# EAGLE board coilcube (EAGLE 6.3)
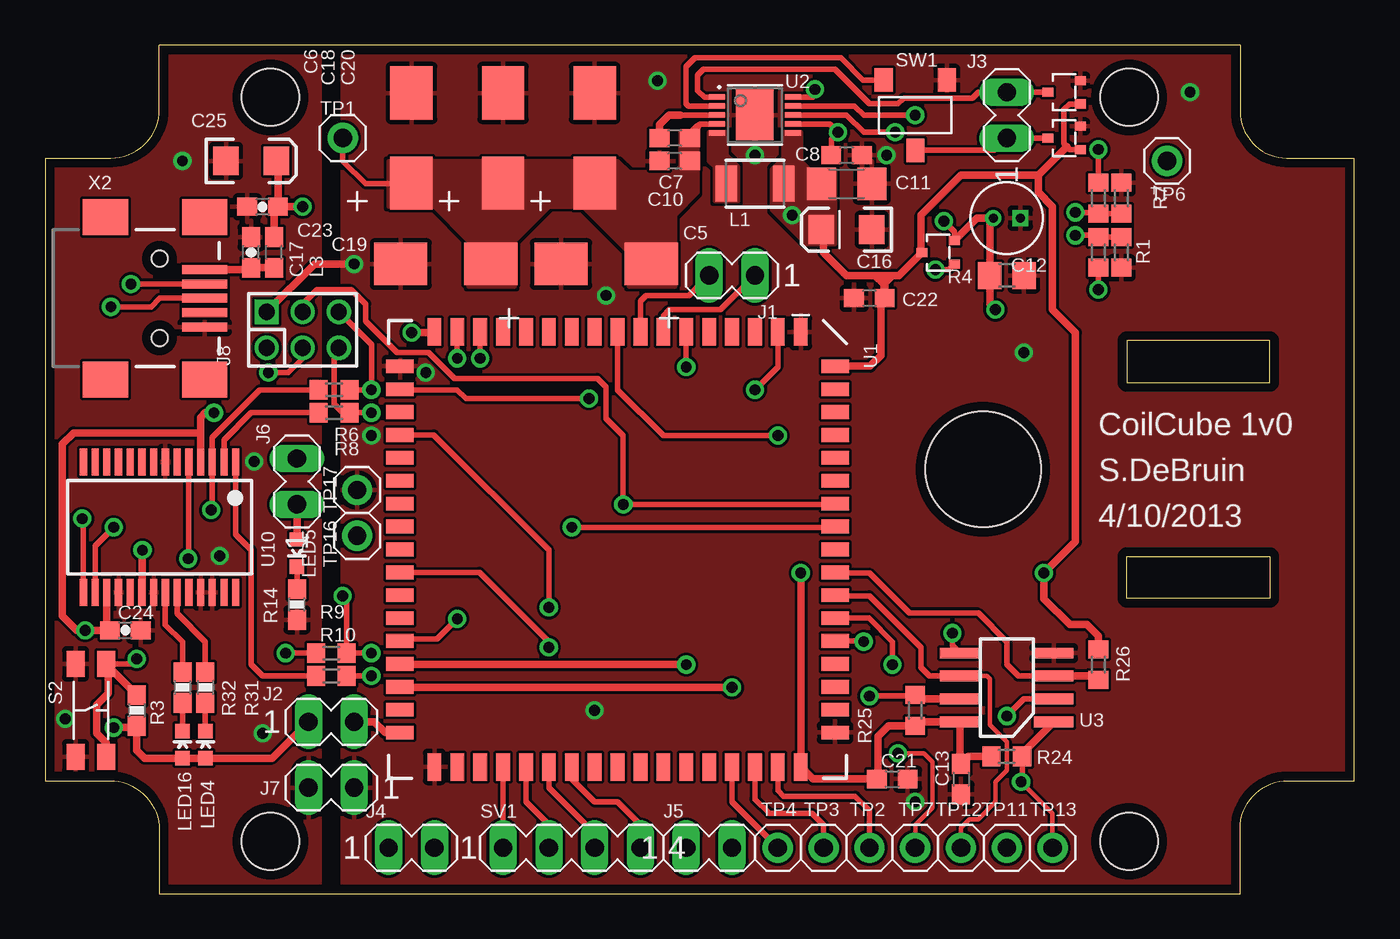
[diagram p0: board, top side]
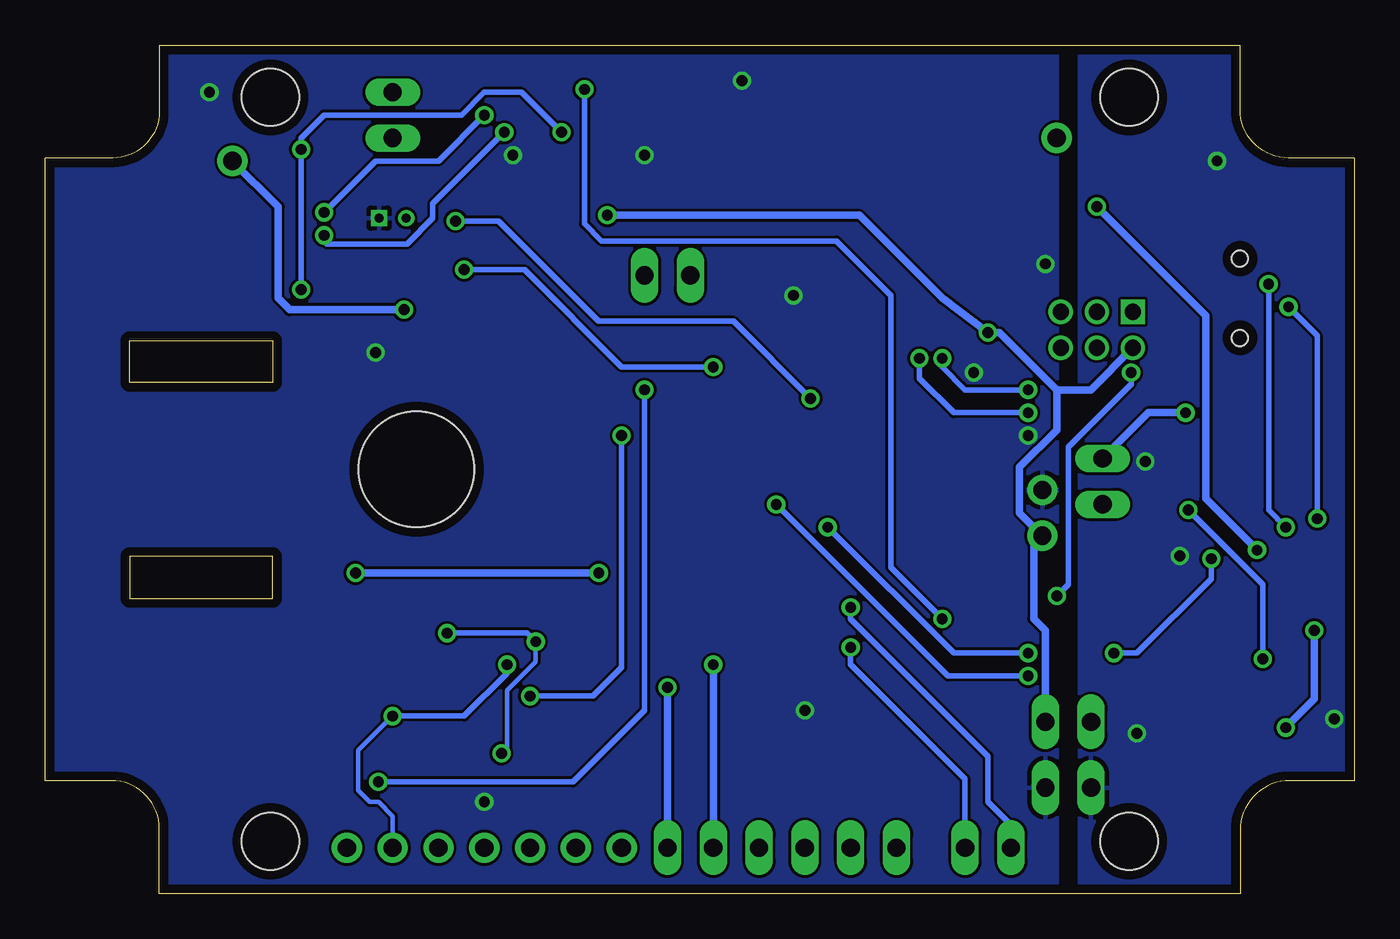
[diagram p1: board, bottom side, seen from below]

Size 72.62 x 47.07 mm. Coordinates in mm from the lower left corner, seen from the top.
Outline: 6.34,0 66.28,0 66.28,3.6 arc-90 68.94,6.26 72.62,6.26 72.62,40.8 68.87,40.8 arc-90 66.28,43.39 66.28,47.07 6.34,47.07 6.34,43.49 arc-90 3.65,40.8 0,40.8 0,6.26 3.58,6.26 arc-90 6.34,3.51 6.34,0
Outline: 59.99,30.68 59.99,28.35 67.92,28.35 67.92,30.68 59.99,30.68
Outline: 59.99,16.36 59.99,18.69 67.92,18.69 67.92,16.36 59.99,16.36
Copper layers (1*16): Top 0.0178mm / dielectric 59mil / Bottom 0.0178mm
Design rules "SSC-EAGLE-2Lyr_v1.0.0.3": minimum track width 6mil, minimum drill 14mil, track to track 6mil, track to pad 6mil, pad to pad 6mil, via to via 6mil, smd to smd 6mil, copper to edge 20mil, drill to drill 16mil, minimum pad ring 8mil, minimum via ring 8mil, stop-mask expansion 3mil, vias tented up to drill 0mil, thermal gap 10mil
Holes 6.43 mm at 52.02,23.53
Holes 3.17 mm at 12.5,44.17 12.5,2.9 60.12,2.9 60.12,44.17

## Footprints (pad centres in the part's own frame; a part is rotated, then mirrored left to right if it is on the bottom)
2917_CAP_POL = smd 2.95 x 2.35: + -2.5,0; - 2.5,0
C0603 = smd 1.1 x 1: 1 -0.85,0; 2 0.85,0
C1206 = smd 1.6 x 1.8: 1 -1.4,0; 2 1.4,0
CPOL_EEA_1MM5 = drill 0.5: + 0.75,0 | drill 0.5 square: - -0.75,0
EIA3216 = smd 1.4 x 1.6: A 1.4,0; C -1.4,0
0603-CAP = smd 1.1 x 1: 1 -0.85,0; 2 0.85,0
MA02-1 = drill 1.016 long: 1 -1.27,0; 2 1.27,0
HEADER2X3X2MM = drill 0.9: P$1 -1,2; P$3 -1,0; P$4 1,0; P$5 -1,-2; P$6 1,-2 | drill 0.9 square: P$2 1,2
1210 = smd 1.2 x 2: 1 -1.6,0; 2 1.6,0
0603 = smd 1.1 x 1: 1 -0.85,0; 2 0.85,0
LED-0603 = smd 0.8 x 0.8: A 0,-0.75; C 0,0.75
R0603 = smd 1 x 1.1: 1 -0.85,0; 2 0.85,0
0603-RES = smd 1.1 x 1: 1 -0.85,0; 2 0.85,0
R0805 = smd 1.3 x 1.5: 1 -0.95,0; 2 0.95,0
SWITCH-OFF-MOM = smd 1.45 x 1: P$1 2.575,0.85; P$2 2.575,-0.85; P$3 -2.575,0.85; P$4 -2.575,-0.85
MA04-1 = drill 1.016 long: 1 -3.81,0; 2 -1.27,0; 3 1.27,0; 4 3.81,0
SWITCH_SPDP = smd 1 x 1.3: P1 1.75,-1.95; P2 0,1.95; P3 -1.75,-1.95
NCHAN_MOSFET = smd 0.6 x 0.5: D -0.9,0; G 0.9,-0.65; S 0.9,0.65
MA01-1 = drill 1.016 pad 1.676: 1 0,0
EPIC-LCC68 = smd 1.524 x 0.762: P$1 -12.065,10.16; P$2 -12.065,8.89; P$3 -12.065,7.62; P$4 -12.065,6.35; P$5 -12.065,5.08; P$6 -12.065,3.81; P$7 -12.065,2.54; P$8 -12.065,1.27; P$9 -12.065,0; P$10 -12.065,-1.27; P$11 -12.065,-2.54; P$12 -12.065,-3.81; P$13 -12.065,-5.08; P$14 -12.065,-6.35; P$15 -12.065,-7.62; P$16 -12.065,-8.89; P$17 -12.065,-10.16; P$35 12.065,-10.16; P$36 12.065,-8.89; P$37 12.065,-7.62; P$38 12.065,-6.35; P$39 12.065,-5.08; P$40 12.065,-3.81; P$41 12.065,-2.54; P$42 12.065,-1.27; P$43 12.065,0; P$44 12.065,1.27; P$45 12.065,2.54; P$46 12.065,3.81; P$47 12.065,5.08; P$48 12.065,6.35; P$49 12.065,7.62; P$50 12.065,8.89; P$51 12.065,10.16 | smd 0.762 x 1.524: P$18 -10.16,-12.065; P$19 -8.89,-12.065; P$20 -7.62,-12.065; P$21 -6.35,-12.065; P$22 -5.08,-12.065; P$23 -3.81,-12.065; P$24 -2.54,-12.065; P$25 -1.27,-12.065; P$26 0,-12.065; P$27 1.27,-12.065; P$28 2.54,-12.065; P$29 3.81,-12.065; P$30 5.08,-12.065; P$31 6.35,-12.065; P$32 7.62,-12.065; P$33 8.89,-12.065; P$34 10.16,-12.065; P$52 10.16,12.065; P$53 8.89,12.065; P$54 7.62,12.065; P$55 6.35,12.065; P$56 5.08,12.065; P$57 3.81,12.065; P$58 2.54,12.065; P$59 1.27,12.065; P$60 0,12.065; P$61 -1.27,12.065; P$62 -2.54,12.065; P$63 -3.81,12.065; P$64 -5.08,12.065; P$65 -6.35,12.065; P$66 -7.62,12.065; P$67 -8.89,12.065; P$68 -10.16,12.065
MSOP-10-GNDPAD = smd 0.305 x 0.889: 1 -1,-2.11; 2 -0.5,-2.11; 3 0,-2.11; 4 0.5,-2.11; 5 1,-2.11; 6 1,2.11; 7 0.5,2.11; 8 0,2.11; 9 -0.5,2.11; 10 -1,2.11 | smd 2.794 x 2.083: GND 0,0
SOIC_8 = smd 2.2 x 0.6: P1 -2.6,1.905; P2 -2.6,0.635; P3 -2.6,-0.635; P4 -2.6,-1.905; P5 2.6,-1.905; P6 2.6,-0.635; P7 2.6,0.635; P8 2.6,1.905
SSOP28 = smd 0.4 x 1.5: 1 -4.225,-3.625; 2 -3.575,-3.625; 3 -2.925,-3.625; 4 -2.275,-3.625; 5 -1.625,-3.625; 6 -0.975,-3.625; 7 -0.325,-3.625; 8 0.325,-3.625; 9 0.975,-3.625; 10 1.625,-3.625; 11 2.275,-3.625; 12 2.925,-3.625; 13 3.575,-3.625; 14 4.225,-3.625; 15 4.225,3.625; 16 3.575,3.625; 17 2.925,3.625; 18 2.275,3.625; 19 1.625,3.625; 20 0.975,3.625; 21 0.325,3.625; 22 -0.325,3.625; 23 -0.975,3.625; 24 -1.625,3.625; 25 -2.275,3.625; 26 -2.925,3.625; 27 -3.575,3.625; 28 -4.225,3.625
USB-MINIB = smd 2.5 x 0.5: D+ 2.5,0; D- 2.5,0.8; GND 2.5,-1.6; ID 2.5,-0.8; VBUS 2.5,1.6 | smd 2.5 x 2: GND@1 -3,-4.5; GND@2 -3,4.5; GND@3 2.5,4.5; GND@4 2.5,-4.5 | hole 0.9: 0,2.2; 0,-2.2

## Placement (x,y rotation side)
C5  100uF 25V  [2917_CAP_POL]  31.11,34.92 180 top
C6  100uF 25V  [2917_CAP_POL]  20.32,41.91 90 top
C7  1uF  [C0603]  34.92,41.91 180 top
C8  4.7uF  [C0603]  44.45,40.96 0 top
C10  0.1uF  [C0603]  34.92,40.64 180 top
C11  10uF  [C1206]  44.45,39.37 0 top
C12  2.2uF  [CPOL_EEA_1MM5]  53.34,37.47 180 top
C13  0.1uF  [C0603]  50.8,6.35 270 top
C16  47uF  [EIA3216]  44.45,36.83 180 top
C17  [0603-CAP]  11.43,35.56 90 top
C18  100uF 25V  [2917_CAP_POL]  25.4,41.91 90 top
C19  100uF 25V  [2917_CAP_POL]  22.23,34.92 180 top
C20  100uF 25V  [2917_CAP_POL]  30.48,41.91 90 top
C21  0.1uF  [C0603]  46.99,6.35 0 top
C22  0.1uF  [C0603]  45.72,33.02 180 top
C23  [0603-CAP]  12.06,38.1 180 top
C24  [0603-CAP]  4.45,14.61 0 top
C25  [EIA3216]  11.43,40.64 0 top
J1  MA02-1  [MA02-1]  38.1,34.29 180 top
J2  MA02-1  [MA02-1]  15.88,9.53 0 top
J3  MA02-1  [MA02-1]  53.34,43.18 90 top
J4  MA02-1  [MA02-1]  20.32,2.54 0 top
J5  MA02-1  [MA02-1]  36.83,2.54 0 top
J6  MA02-1  [MA02-1]  13.97,22.86 90 top
J7  MA02-1  [MA02-1]  15.88,5.87 180 top
J8  EPIC-PROG-PORT  [HEADER2X3X2MM]  14.29,31.27 90 top
L1  10uH  [1210]  39.37,39.37 0 top
L3  [0603]  12.7,35.56 90 top
LED4  [LED-0603]  8.89,8.26 0 top
LED5  [LED-0603]  13.97,18.89 180 top
LED16  [LED-0603]  7.62,8.26 0 top
R1  0  [R0603]  58.42,35.56 270 top
R2  NP  [R0603]  59.69,35.56 270 top
R3  10k  [0603-RES]  5.08,10.16 270 top
R4  4.7M  [R0805]  53.34,34.29 180 top
R5  NP  [R0603]  58.42,38.58 90 top
R6  0  [R0603]  16.03,27.94 0 top
R7  0  [R0603]  59.69,38.58 90 top
R8  0  [R0603]  16.03,26.67 0 top
R9  0  [R0603]  15.88,13.34 0 top
R10  0  [R0603]  15.88,12.06 0 top
R14  240  [0603-RES]  13.97,16.03 90 top
R24  4.7k  [R0603]  53.34,7.62 180 top
R25  4.7k  [R0603]  48.26,10.16 270 top
R26  4.7k  [R0603]  58.42,12.7 90 top
R31  240  [0603-RES]  8.89,11.43 270 top
R32  240  [0603-RES]  7.62,11.43 270 top
S2  SWITCH-OFF-MOM  [SWITCH-OFF-MOM]  2.54,10.16 90 top
SV1  [MA04-1]  29.21,2.54 0 top
SW1  SWITCH_SPDP  [SWITCH_SPDP]  48.26,43.18 180 top
T1  NCHAN_MOSFET  [NCHAN_MOSFET]  56.52,44.45 0 top
T2  NCHAN_MOSFET  [NCHAN_MOSFET]  49.53,35.56 0 top
T3  NCHAN_MOSFET  [NCHAN_MOSFET]  56.52,41.91 0 top
TP1  ORANGE  [MA01-1]  16.51,41.91 0 top
TP2  WHITE  [MA01-1]  45.72,2.54 0 top
TP3  WHITE  [MA01-1]  43.18,2.54 0 top
TP4  WHITE  [MA01-1]  40.64,2.54 0 top
TP6  BLUE  [MA01-1]  62.23,40.64 0 top
TP7  WHITE  [MA01-1]  48.26,2.54 0 top
TP11  WHITE  [MA01-1]  53.34,2.54 0 top
TP12  WHITE  [MA01-1]  50.8,2.54 0 top
TP13  GREEN  [MA01-1]  55.88,2.54 0 top
TP16  RED  [MA01-1]  17.3,19.84 0 top
TP17  BLACK  [MA01-1]  17.3,22.38 0 top
U1  EPIC-CORE_A  [EPIC-LCC68]  31.75,19.09 270 top
U2  LTC3588_  [MSOP-10-GNDPAD]  39.37,43.18 270 top
U3  FM25LB  [SOIC_8]  53.34,11.43 180 top
U10  FT232RL  [SSOP28]  6.35,20.32 180 top
X2  USBSMD  [USB-MINIB]  6.35,33.02 0 top

## Library data of the parts
C5 C6 C18-C20 = coilcube; DIGIKEY: 399-5175-1-ND
C7 = rcl; DIGIKEY: 445-1321-1-ND
C8 = rcl; DIGIKEY: 445-5178-1-ND
C10 C13 C21 C22 = rcl; DIGIKEY: 445-1316-1-ND
C11 = rcl; DIGIKEY: 399-8152-1-ND
C12 = coilcube; DIGIKEY: P14506-ND
C16 = SparkFun-Passives; DIGIKEY: 399-3700-1-ND
C17 C23 C24 = SparkFun; DIGIKEY: 445-1316-1-ND
C25 = SparkFun; DIGIKEY: 478-1655-1-ND
J1 J2 J4 J6 J7 = con-lstb; DIGIKEY: 609-4434-ND
J3 = con-lstb; DIGIKEY: A98333-ND
J5 = con-lstb; DIGIEKY: 609-4434-ND
J8 = berkeley-epic; DIGIKEY: WM18834-ND
L1 = SparkFun-Passives; DIGIKEY: 587-1625-1-ND
L3 = SparkFun; DIGIKEY: 240-2373-1-ND
LED4 = SparkFun; DIGIKEY: 1080-1400-1-ND
LED5 LED16 = SparkFun; DIGIKEY: 1080-1405-1-ND
R1 R6-R10 = rcl; DIGIKEY: P0.0GCT-ND
R2 R5 = rcl
R3 = SparkFun; DIGIKEY: P10KGCT-ND
R4 = rcl; DIGIKEY: P4.7MACT-ND
R14 R31 R32 = SparkFun; DIGIKEY: P240GCT-ND
R24-R26 = rcl; DIGIKEY: P4.7KGCT-ND
S2 = p498; DIGIKEY: P11084SCT-ND
SV1 = con-lstb; DIGIKEY: 609-3248-ND; OC_FARNELL: unknown; OC_NEWARK: unknown
SW1 = coilcube; DIGIKEY: 563-1022-1-ND
T1 T3 = Power_Metering; DIGIKEY: SI1302DL-T1-GE3CT-ND
T2 = Power_Metering; DIGIKEY: 568-3244-1-ND
TP1 = con-lstb; DIGIKEY: 5003K-ND
TP2-TP4 TP7 TP11 TP12 = con-lstb; DIGIKEY: 5002K-ND
TP6 = con-lstb; DIGIKEY: 5117K-ND
TP13 = con-lstb; DIGIKEY: 5116K-ND
TP16 = con-lstb; DIGIKEY: 5000K-ND
TP17 = con-lstb; DIGIKEY: 5001K-ND
U1 = berkeley-epic
U2 = SparkFun-PowerIC; DIGIKEY: LTC3588EMSE-1#PBF-ND
U3 = coilcube; DIGIKEY: 428-3210-ND
U10 = ftdichip; DIGIKEY: 768-1007-1-ND; MPN: FT232RL; OC_FARNELL: 1146032; OC_NEWARK: 91K9918
X2 = SparkFun; DIGIKEY: 670-1190-1-ND

## Nets
+3V3: C11.1 C13.1 C16.A C21.1 C22.1 J2.2 J8.P$1 L1.2 R24.2 R25.2 R26.2 T1.G T2.D T3.G TP16.1 U1.P$17 U1.P$34 U1.P$51 U1.P$68 U2.6 U3.P8
D0: R5.1 R7.1 U2.9
D1: R1.1 R2.1 U2.8
FRAM_CS: R24.1 TP13.1 U1.P$2 U3.P1
FRAM_HOLD: R25.1 U1.P$9 U3.P7
FRAM_WP: R26.1 U1.P$59 U3.P3
FTDIVDD: C24.1 J2.1 J6.2 LED4.A LED16.A R3.2 U10.4 U10.17
GND: C5.- C6.- C8.2 C10.2 C11.2 C12.- C13.2 C16.C C18.- C19.- C20.- C21.2 C22.2 J7.1 J8.P$2 R2.2 R4.1 R7.2 SW1.P3 T1.S T3.S TP17.1 U1.P$1 U1.P$18 U1.P$35 U1.P$52 U2.GND U3.P4
IGND: C17.2 C23.2 C24.2 C25.C J7.2 R14.1 S2.P$1 S2.P$3 U10.7 U10.18 U10.21 U10.25 U10.26 X2.GND
MISO0: TP11.1 U1.P$57 U3.P2
MOSI0: TP7.1 U1.P$56 U3.P5
N$1: J3.1 SW1.P2 T3.D
N$2: J5.1 U1.P$31
N$3: J5.2 U1.P$32
N$4: J4.1 U1.P$21
N$5: J4.2 U1.P$27
N$6: SV1.4 U1.P$41
N$7: SV1.3 U1.P$40
N$8: SV1.2 U1.P$39
N$9: SV1.1 U1.P$38
N$10: TP2.1 U1.P$50
N$11: J6.1 LED5.A
N$13: TP3.1 U1.P$49
N$14: TP4.1 U1.P$48
N$20: L1.1 U2.5
N$22: C7.2 U2.3
N$26: J1.1 U1.P$7
N$27: J1.2 U1.P$8
N$32: LED5.C R14.2
N$38: U10.15 X2.D+
N$39: U10.16 X2.D-
N$40: LED4.C R31.2
N$41: LED16.C R32.2
N$42: R31.1 U10.23
N$43: R32.1 U10.22
PGOOD: U1.P$30 U2.10
PZ1: J3.2 T1.D U2.1
PZ2: SW1.P1 U2.2
RST: R3.1 R6.1 S2.P$2 S2.P$4 U10.3
RST-S: J8.P$6 R6.2 U1.P$16
RX1: R10.1 U10.1
RX1-S: J8.P$4 R10.2 U1.P$62
SCK0: TP12.1 U1.P$58 U3.P6
TCK: R8.1 U10.2
TCK-S: J8.P$5 R8.2 U1.P$15
TIME_CTL: T2.G U1.P$6
TX1: R9.1 U10.5
TX1-S: J8.P$3 R9.2 U1.P$61
USBVCC1: C23.1 C25.A L3.2 U10.20
VBUS1: C17.1 L3.1 X2.VBUS
VCAP: C5.+ C6.+ C7.1 C10.1 C18.+ C19.+ C20.+ TP1.1 U2.4
VIN2: C8.1 R1.2 R5.2 U2.7
VTIMER: C12.+ R4.2 T2.S TP6.1 U1.P$19

## Tracks (layer width: path | path; a pad name or v marks a point on that pad's centre or on a via)
+3V3  (via drill 0.6)
  Top 0.305: T1.G 56.82,43.8 56.52,43.5 56.52,41.59 56.67,41.43 56.83,41.27 57.4,41.27 T3.G
  Top 0.406: R24.2 51.22,7.62 C13.1 50.74,7.26 U3.P8 48.48,9.53 R25.2 46.77,9.31 46.2,8.73 46.2,6.41 C21.1 42.58,6.35 U1.P$51 v41.91,17.78 | 55.09,39.85 50.8,39.85 48.58,37.62 48.58,35.61 T2.D 47.36,34.29 46.99,34.29 | 55.09,39.85 56.67,41.43 | 46.99,34.29 46.57,33.87 C22.1 46.35,32.8 46.35,29.84 45.76,29.25 U1.P$68 | C16.A 43.18,36.7 43.18,35.56 44.45,34.29 46.04,34.29 | 46.04,34.29 46.35,34.29 | 46.35,34.29 46.99,34.29 | 46.35,34.29 46.51,34.13 46.51,33.81 | 46.51,33.81 46.51,33.34 | 46.04,34.29 46.51,33.81 | v20.32,31.11 21.55,31.11 U1.P$17 | R26.2 58.42,14.29 57.78,14.92 56.83,14.92 55.4,16.35 v55.4,17.78 57.15,19.53 57.15,31.11 55.88,32.38 55.88,38.1 55.09,38.89 55.09,39.85 | U1.P$34 18.85,8.93 18.26,9.53 J2.2
  Bottom 0.406: v41.43,37.62 27.46,37.62 22.86,33.02 v20.32,31.11 19.68,31.11 16.51,27.94 | v41.91,17.78 v55.4,17.78 | J8.P$1 14.62,27.94 16.51,27.94 | 16.51,27.94 16.51,25.72 18.57,23.65 18.57,21.11 TP16.1 17.78,19.37 17.78,15.24 17.14,14.61 J2.2
  pour Top (no thermals): 40.32,40.16 40.32,37.94 42.23,36.04 43.81,36.04 43.81,40.16 42.39,40.16 41.91,40.64 41.91,42.23 40.96,42.23 40.96,40.96 40.96,40.8
D0  (via drill 0.6)
  Top 0.305: U2.9 44.9,43.68 45.4,43.18 v48.26,43.18 | v57.15,37.78 58.36,37.78 R5.1 R7.1
  Bottom 0.305: v48.26,43.18 50.8,40.64 54.29,40.64 v57.15,37.78
D1  (via drill 0.6)
  Top 0.305: U2.8 44.45,43.18 45.4,42.23 v47.15,42.23 | v57.15,36.51 58.32,36.51 R1.1 R2.1
  Bottom 0.305: v47.15,42.23 51.12,38.26 51.12,37.47 52.55,36.04 56.99,36.04 v57.15,36.51
FRAM_CS  (via drill 0.6)
  Top 0.254: v54.13,6.19 55.88,4.45 TP13.1
  Top 0.305: 54.19,7.78 R24.1 54.19,6.25 v54.13,6.19 | U1.P$2 40.64,29.21 v39.37,27.94
  Top 0.406: 54.19,7.78 U3.P1
  Bottom 0.305: v54.13,6.19 43.34,6.19 39.37,10.16 v39.37,27.94
FRAM_HOLD  (via drill 0.6)
  Top 0.305: U1.P$9 31.75,27.94 34.29,25.4 v40.64,25.4 | v45.72,10.95 48.2,10.95 R25.1
  Top 0.406: U3.P7 48.48,10.79 R25.1
  Bottom 0.305: v45.72,10.95 42.23,10.95 40.64,12.54 v40.64,25.4
FRAM_WP
  Top 0.305: U1.P$59 43.85,17.78 45.72,17.78 47.94,15.56 51.75,15.56 53.34,13.97 53.34,12.7 53.98,12.06 U3.P3
  Top 0.406: R26.1 58.2,12.06 U3.P3
FTDIVDD  (via drill 0.6)
  Top 0.406: U10.17 3.42,14.78 C24.1 v2.22,14.61 1.75,14.61 0.95,15.4 0.95,24.92 1.59,25.56 8.52,25.56 8.62,25.45 | v3.81,9.21 4.98,9.21 R3.2 5.08,7.94 5.51,7.5 LED16.A LED4.A 12.59,7.5 J2.1 | 8.62,25.45 U10.4 | 8.62,25.45 8.62,26.41 8.89,26.67 v9.37,26.67
  Bottom 0.406: v2.22,14.61 2.22,10.79 v3.81,9.21 | v9.37,26.67 11.43,26.67 J6.2
GND  (via drill 0.6)
  Top 0.406: J8.P$2 14.94,34.92 v17.14,34.92
  other vias: 39.37,40.96 31.11,33.18 33.97,45.09 63.5,44.45 46.67,40.96 54.29,30 48.26,5.08 21.11,28.89 18.1,25.4 30.48,10.16
  pour Bottom (rank 6): 16.51,8.89 16.51,0 73.66,0 73.66,20.32 73.66,46.99 16.51,46.99
  pour Top (rank 6): 16.51,8.89 16.51,0 73.66,0 73.66,20.32 73.66,46.99 16.51,46.99
IGND  (via drill 0.6)
  other vias: 7.62,40.64 12.06,8.89 9.68,18.73 11.59,23.97 1.11,9.68
  pour Bottom (rank 5): 0,46.99 0,0 15.24,0 15.24,46.99
  pour Top (rank 5): 0,46.99 0,0 15.24,0 15.24,46.99
MISO0  (via drill 0.6)
  Top 0.305: U1.P$57 45.68,15.28 46.99,13.97 v46.99,12.7 | v53.34,9.84 54.29,10.79 U3.P2
  Bottom 0.254: v53.34,9.84 55.24,7.94 55.24,5.71 54.61,5.08 54.13,5.08 53.34,4.29 TP11.1
  Bottom 0.305: v46.99,12.7 46.99,12.22 49.37,9.84 v53.34,9.84
MOSI0  (via drill 0.6)
  Top 0.254: v47.31,7.78 48.74,7.78 49.21,7.3 49.21,4.76 48.26,3.81 TP7.1
  Top 0.305: v45.4,13.97 45.36,14.01 U1.P$56 | U3.P5 50.32,13.75 v50.32,14.45
  Bottom 0.254: v45.4,13.97 45.4,12.86 46.99,11.27 46.99,8.1 v47.31,7.78
  Bottom 0.305: v45.4,13.97 45.88,14.45 v50.32,14.45
N$1
  Top 0.305: T3.D J3.1 52.66,41.23 SW1.P2
N$2  (via drill 0.6)
  Top 0.406: U1.P$31 19.72,12.7 v35.56,12.7
  Bottom 0.406: v35.56,12.7 J5.1
N$3  (via drill 0.6)
  Top 0.406: U1.P$32 19.72,11.43 v38.1,11.43
  Bottom 0.406: v38.1,11.43 J5.2
N$4  (via drill 0.6)
  Top 0.305: U1.P$21 21.55,25.44 27.94,19.05 v27.94,15.88
  Bottom 0.305: v27.94,15.88 27.94,15.24 20.32,7.62 20.32,5.08 19.05,3.81 J4.1
N$5  (via drill 0.6)
  Top 0.305: U1.P$27 24.09,17.82 27.94,13.97 v27.94,13.65
  Bottom 0.305: v27.94,13.65 27.94,12.7 21.59,6.35 J4.2
N$6
  Top 0.305: U1.P$41 29.21,6.35 30.48,5.08 31.75,5.08 33.02,3.81 SV1.4
N$7
  Top 0.305: U1.P$40 27.94,5.87 30.48,3.33 SV1.3
N$8
  Top 0.305: U1.P$39 26.67,5.08 27.94,3.81 SV1.2
N$9
  Top 0.305: U1.P$38 SV1.1
N$10
  Top 0.305: U1.P$50 40.64,5.71 40.96,5.4 44.93,5.4 45.72,4.6 TP2.1
N$11
  Top 0.406: J6.1 LED5.A
N$13
  Top 0.305: U1.P$49 39.37,5.24 40.16,4.45 42.55,4.45 43.18,3.81 TP3.1
N$14
  Top 0.305: U1.P$48 38.1,5.08 TP4.1
N$20
  pour Top (no thermals): 37.47,42.23 36.83,42.23 36.83,40.64 37.15,40.32 37.15,38.42 38.42,38.42 38.42,40.32 37.78,40.96 37.78,42.23
N$22
  Top 0.305: U2.3 35.24,43.18
  Top 0.406: C7.2 34.08,42.65 34.61,43.18 35.24,43.18
N$26
  Top 0.305: U1.P$7 34.29,32.07 34.61,32.38 37.47,32.38 J1.1
N$27
  Top 0.305: U1.P$8 33.02,32.86 33.34,33.18 35.72,33.18 J1.2
N$32
  Top 0.305: R14.2 LED5.C
N$38  (via drill 0.6)
  Top 0.305: X2.D+ 6.35,33.02 5.87,32.54 v3.65,32.54 | v2.06,20.8 2.12,20.73 U10.15
  Bottom 0.305: v3.65,32.54 2.06,30.96 v2.06,20.8
N$39  (via drill 0.6)
  Top 0.305: X2.D- v4.77,33.82 v4.76,33.81 | v3.81,20.32 2.77,19.29 U10.16
  Bottom 0.305: v4.76,33.81 4.76,21.27 v3.81,20.32
N$40
  Top 0.305: R31.2 LED4.C
N$41
  Top 0.305: R32.2 LED16.C
N$42
  Top 0.305: U10.23 7.33,15.54 8.89,13.97 R31.1
N$43
  Top 0.305: U10.22 6.67,14.91 7.62,13.97 R32.1
PGOOD  (via drill 0.6)
  Top 0.305: U2.10 42.59,44.18 v42.7,44.61 | v22.86,15.24 21.75,14.13 19.81,14.13 U1.P$30
  Bottom 0.305: v42.7,44.61 42.7,37.15 41.75,36.2 28.73,36.2 25.72,33.18 25.72,18.1 v22.86,15.24
PZ1
  Top 0.305: T1.D J3.2 51.75,44.45 51.44,44.13 47.62,44.13 47.31,43.81 45.72,43.81 43.81,45.72 36.51,45.72 36.2,45.4 36.2,44.55 36.56,44.18 U2.1
PZ2
  Top 0.305: U2.2 35.7,43.68 35.56,43.81 35.56,45.88 36.04,46.35 44.13,46.35 45.36,45.13 SW1.P1
RST  (via drill 0.6)
  Top 0.305: S2.P$2 4.8,12.73 v5.08,13.02 | v9.21,21.27 9.28,21.34 U10.3 9.28,25.31 11.91,27.94 R6.1
  Top 0.406: R3.1 3.39,12.7 S2.P$2 3.49,12.63 3.49,11.11 2.86,10.48 2.86,8.89 3.39,8.36 S2.P$4
  Bottom 0.305: v5.08,13.02 5.08,17.14 v9.21,21.27
RST-S  (via drill 0.6)
  Top 0.305: v22.86,29.69 U1.P$16 | R6.2 v18.1,27.94 18.1,30.46 J8.P$6
  Bottom 0.305: v18.1,27.94 21.59,27.94 22.86,29.21 v22.86,29.69
RX1
  Top 0.305: U10.1 10.57,19.91 11.43,19.05 11.43,12.7 12.06,12.06 R10.1
RX1-S  (via drill 0.6)
  Top 0.305: U1.P$62 43.78,21.59 v32.07,21.59 32.07,25.4 31.11,26.35 31.11,28.1 30.64,28.57 22.7,28.57 21.27,30 19.53,30 17.78,31.75 17.78,32.7 16.99,33.5 15.08,33.5 14.92,33.34 14.29,32.7 J8.P$4 | R10.2 v18.1,12.06
  Bottom 0.305: v18.1,12.06 22.54,12.06 v32.07,21.59
SCK0
  Top 0.254: U3.P6 52.23,12.06 52.39,11.91 52.39,9.37 53.34,8.41 53.34,6.83 52.7,6.19 52.7,5.08 51.75,4.13 51.28,4.13 50.8,3.65 TP12.1
  Top 0.305: U1.P$58 43.85,16.51 45.72,16.51 48.58,13.65 48.58,12.54 49.05,12.06 U3.P6
TCK
  Top 0.305: U10.2 9.93,25.16 11.43,26.67 R8.1 15.24,26.67
TCK-S  (via drill 0.6)
  Top 0.305: v24.13,29.69 U1.P$15 | v18.1,26.67 R8.2 16.51,26.67 16.03,27.15 16.03,30.02 J8.P$5
  Bottom 0.305: v18.1,26.67 22.23,26.67 24.13,28.57 v24.13,29.69
TIME_CTL  (via drill 0.6)
  Top 0.305: U1.P$6 v35.56,29.21 | v49.37,34.61 50.13,34.61 T2.G
  Bottom 0.305: v49.37,34.61 46.04,34.61 40.64,29.21 v35.56,29.21
TX1  (via drill 0.6)
  Top 0.305: v7.94,18.57 7.97,18.61 U10.5 | v13.34,13.34 R9.1
  Bottom 0.305: v13.34,13.34 12.06,13.34 7.94,17.46 v7.94,18.57
TX1-S  (via drill 0.6)
  Top 0.305: v29.21,20.32 43.78,20.32 U1.P$61 | v18.1,13.34 R9.2 16.73,16.3 v16.51,16.51 | J8.P$3 14.29,29.69 13.49,28.89 v12.38,28.89
  Bottom 0.305: v18.1,13.34 22.23,13.34 v29.21,20.32 | v12.38,28.89 12.38,28.26 15.88,24.77 15.88,17.14 v16.51,16.51
USBVCC1  (via drill 0.6)
  Top 0.406: L3.2 12.7,37.88 C23.1 | C23.1 12.91,40.55 C25.A | v5.4,19.05 5.38,19.03 U10.20 | C23.1 v14.29,38.1
  Bottom 0.406: v14.29,38.1 8.26,32.07 8.26,21.91 v5.4,19.05
VBUS1
  Top 0.406: X2.VBUS 11.34,34.62 C17.1 L3.1
VCAP
  Top 0.305: TP1.1 16.51,40.64 17.78,39.37 20.28,39.37 C6.+ | U2.4 36.33,42.68 36.2,42.55
  Top 0.406: 36.2,42.55 35.77,42.12 C7.1
  pour Top (rank 2, no thermals): 19.05,40.64 19.05,38.1 21.59,38.1 23.5,36.2 23.5,33.66 26.04,33.66 26.04,36.2 27.94,38.1 29.84,38.1 32.38,35.56 32.38,33.66 34.92,33.66 34.92,37.62 36.2,38.89 36.2,42.23 35.24,42.23 35.24,40.32 34.92,40.01 32.38,40.01 31.75,40.64
VIN2  (via drill 0.6)
  Top 0.305: U2.7 43.52,42.68 v43.97,42.23 43.6,41.85 C8.1 | R5.2 v58.42,41.27 | R1.2 v58.42,33.5
  Bottom 0.305: v43.97,42.23 46.2,44.45 48.26,44.45 49.53,43.18 57.15,43.18 58.42,41.91 v58.42,41.27 v58.42,33.5
VTIMER  (via drill 0.6)
  Top 0.305: U1.P$19 19.72,27.94 22.86,27.94 23.34,27.46 v30.16,27.46 | v49.85,37.31 50.43,36.72 T2.S
  Top 0.406: T2.S 51.69,37.47 C12.+ 52.39,37.27 R4.2 52.39,32.7 v52.7,32.38
  Bottom 0.305: v49.85,37.31 47.47,37.31 41.91,31.75 34.45,31.75 v30.16,27.46
  Bottom 0.406: v52.7,32.38 59.05,32.38 59.69,33.02 59.69,38.1 TP6.1

## Text on the board
tPlace: CoilCube 1v0 | S.DeBruin | 4/10/2013